# Altium PCB PCB.PcbDoc
Units mil, origin at the board's own origin, x right, y up, seen from the top; angles counter-clockwise.
Board outline 1968.5 x 1968.5 mil, 2 copper layers (Top Layer, Bottom Layer); 59 components, 71 nets, 276 pads, 81 vias.
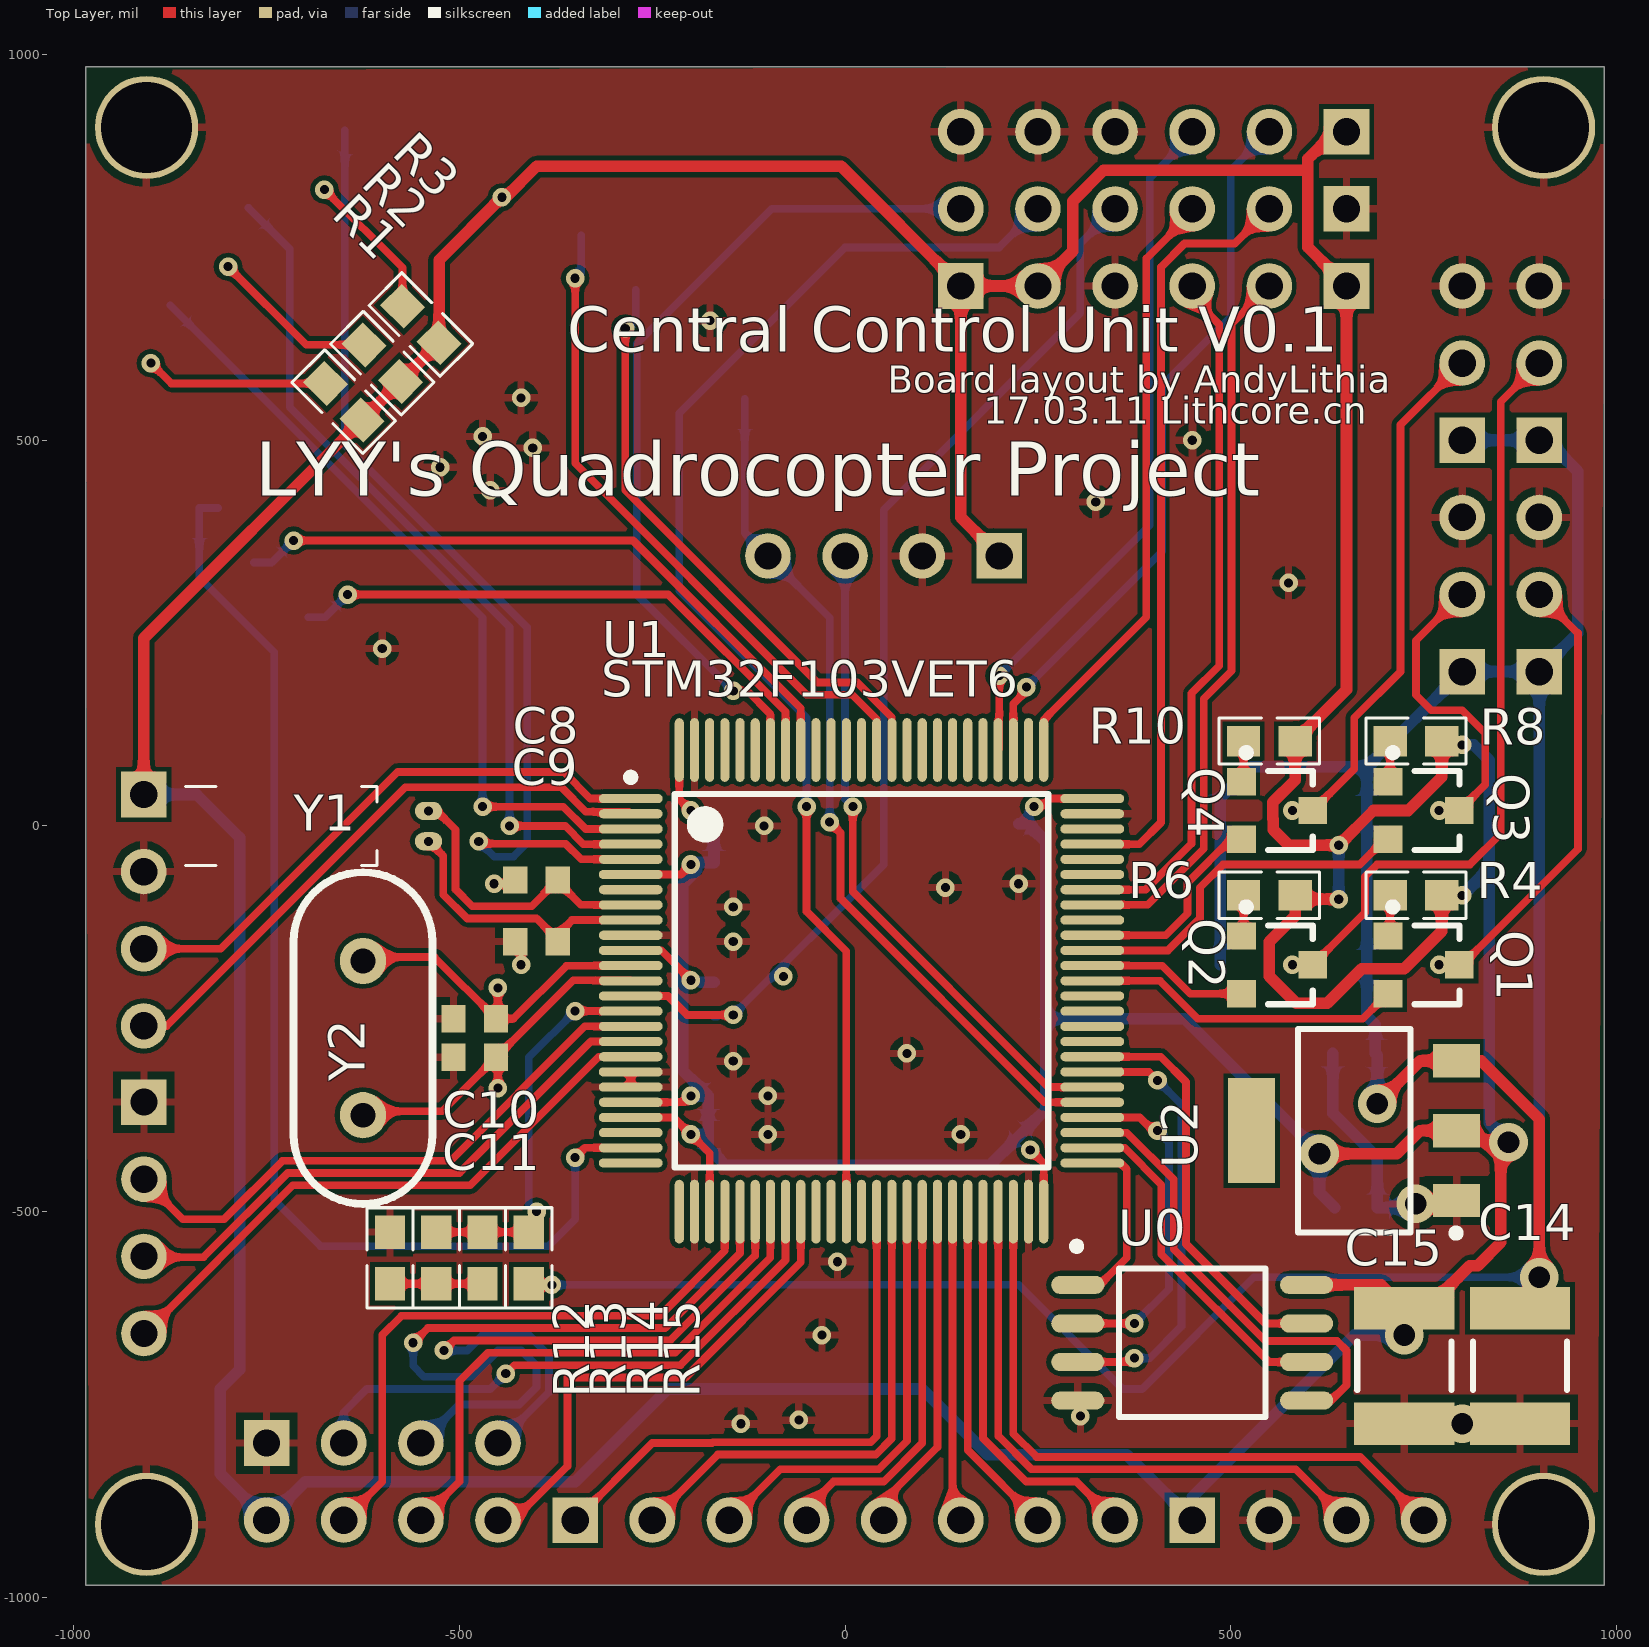
[diagram p0: Top Layer view]
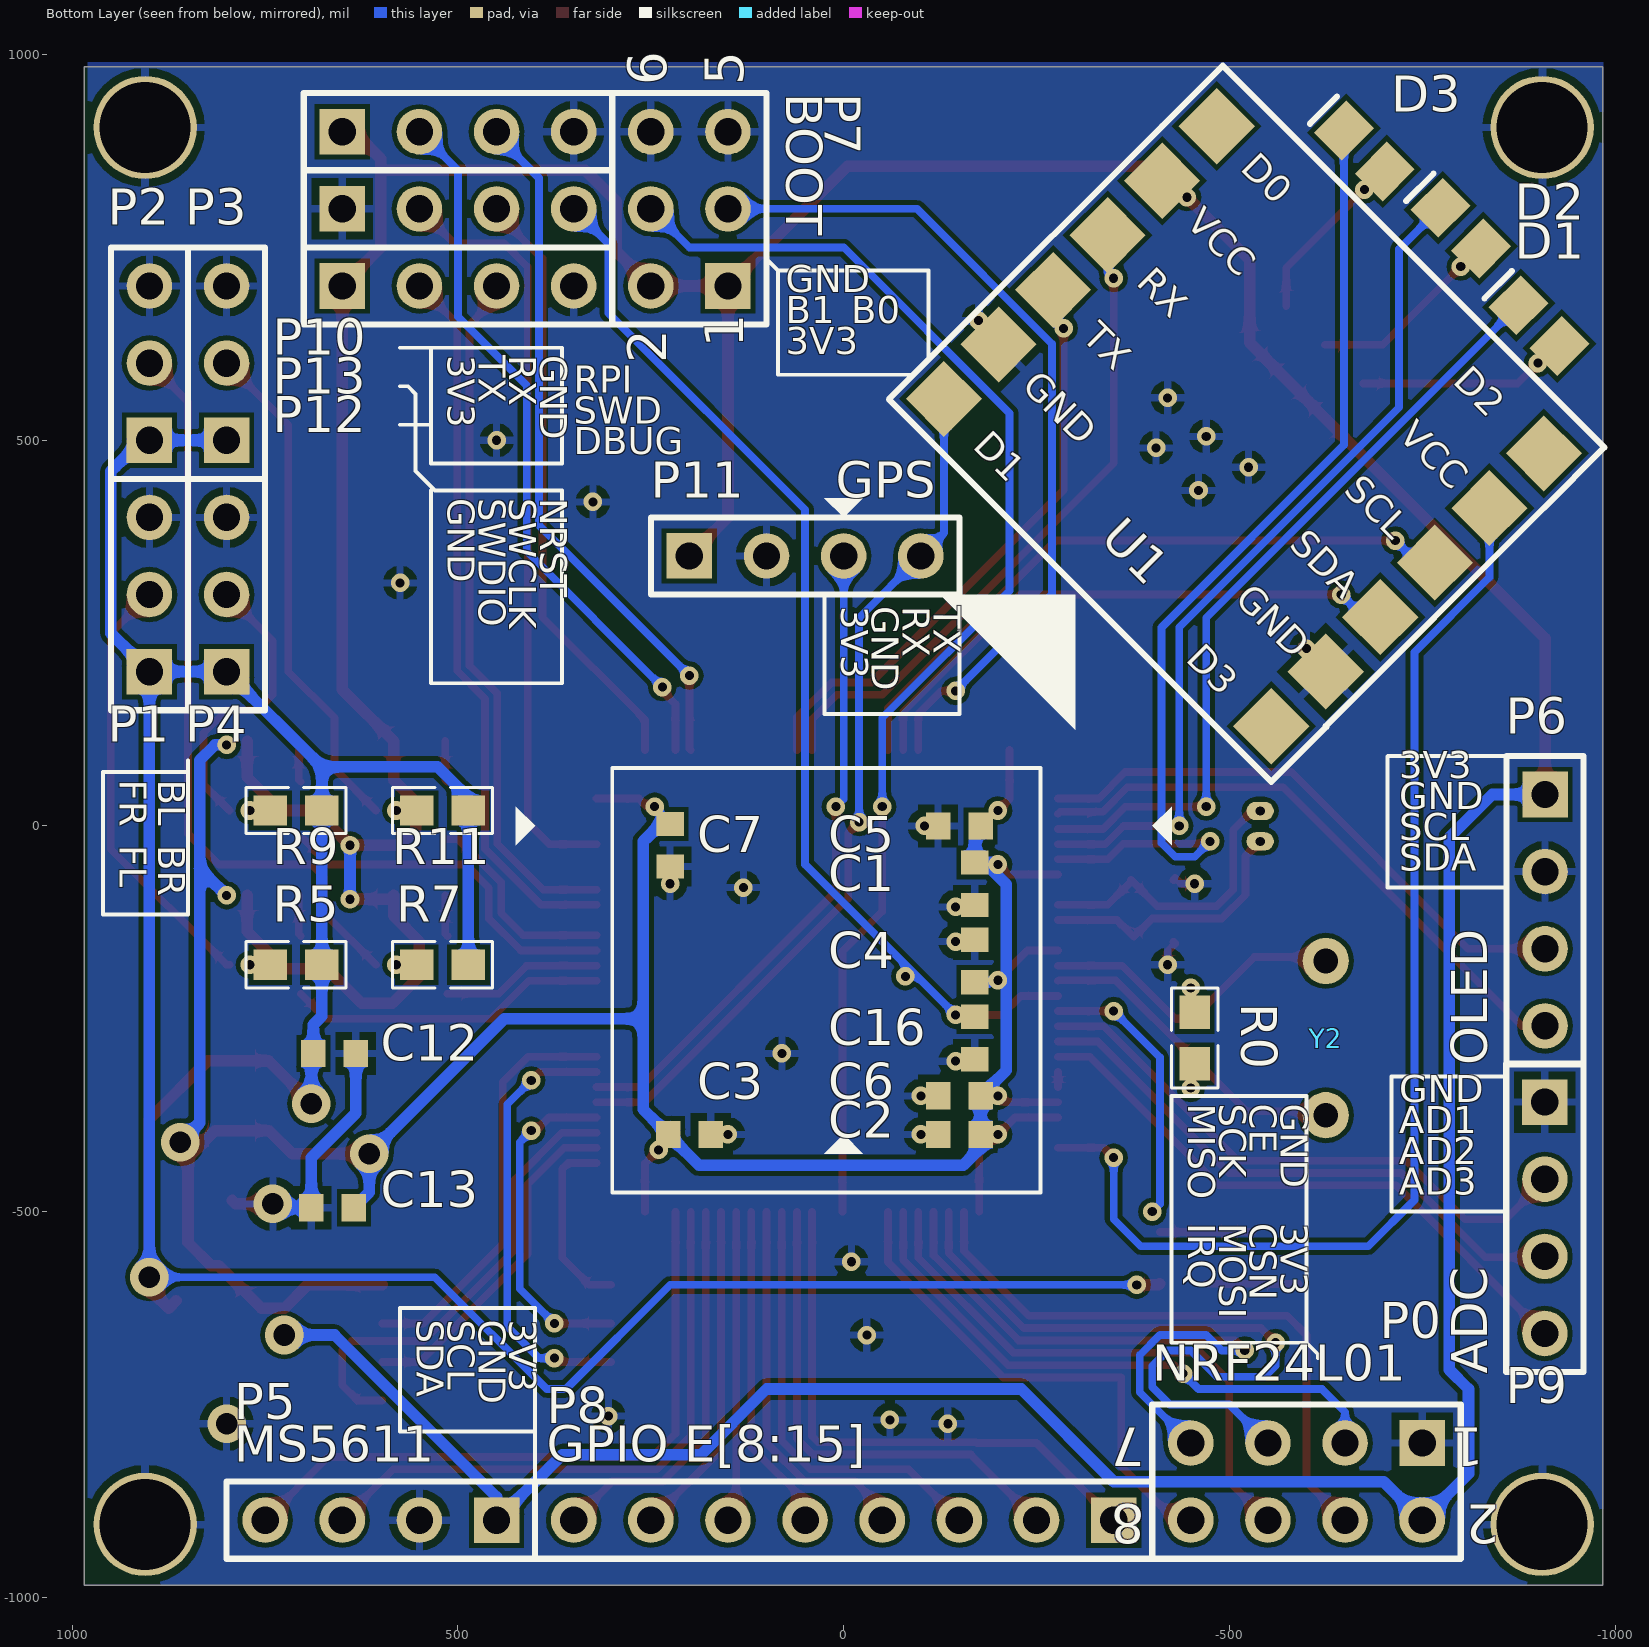
[diagram p1: Bottom Layer view, seen from below]

## Layer stack, top to bottom
Top Solder: solder mask 0.4, Solder Resist, Dk 3.5
Top Layer: signal copper 1.4
Dielectric 1: dielectric 12.6, FR-4, Dk 4.8
Bottom Layer: signal copper 1.4
Bottom Solder: solder mask 0.4, Solder Resist, Dk 3.5

## Board outline
-984.25,-984.25 -984.25,984.25 984.25,984.25 984.25,-984.25

## Design rules (kind name [scope] priority, off if disabled: settings)
Clearance [All] p1: gap=6 ignorepadtopadclearanceinfootprint=FALSE except(0: Arc-Hole Track-Hole SMDPad-Hole THPad-Hole Via-Hole Fill-Hole Poly-Hole Region-Hole Text-Hole)
ComponentClearance [All] p1 off: gap=10 collisioncheckmode=3 verticalgap=10 showdistances=FALSE
PolygonConnect [All] p1: connectstyle=Relief reliefconductorwidth=10 reliefentries=4 polygonreliefangle="90 Angle" airgapwidth=10
RoutingVias [All] p1: holewidth=28 width=50 viastyle="Through Hole" minholewidth=28 minwidth=50 maxholewidth=28 maxwidth=50
SolderMaskExpansion [All] p1: expansion=4
Width [All] p1: maxlimit=20 minlimit=6 preferedwidth=10
29 further rules are at their usual default settings.

## Components (designator, comment, footprint, x,y, rotation, side; value= is the part's Value field where it differs from the comment)
C1 "Cap Semi" 1608[0603] -170,-75 r90 bottom
C2 "Cap Semi" 1608[0603] -150,-400 r180 bottom
C3 "Cap Semi" 1608[0603] 200,-400 r0 bottom
C4 "Cap Semi" 1608[0603] -170,-175 r270 bottom
C5 "Cap Semi" 1608[0603] -150,0 r180 bottom
C6 "Cap Semi" 1608[0603] -150,-350 r0 bottom
C7 "Cap Semi" 1608[0603] 225,-25 r270 bottom
C8 "Cap Semi" 1608[0603] -400,-70 r0 top
C9 "Cap Semi" 1608[0603] -400,-150 r0 top
C10 "Cap Semi" 1608[0603] -480,-250 r0 top
C11 "Cap Semi" 1608[0603] -480,-300 r0 top
C12 "Cap Semi" 1608[0603] 660,-295 r0 bottom
C13 "Cap Semi" 1608[0603] 662.56,-495 r180 bottom
C14 "Cap Pol3" 1812 875,-700 r270 top
C15 "Cap Pol3" 1812 725,-700 r270 top
C16 "Cap Semi" 1608[0603] -170,-275 r270 bottom
D1 "LED0" LED_0805 -901.45,648.55 r45 bottom
D2 "LED0" LED_0805 -800,775 r45 bottom
D3 "LED0" LED_0805 -675,875 r45 bottom
P0 "NRF24L01" HDR2X4 -750,-800 r0 bottom
P1 "PWM" HDR1X3 900,200 r90 bottom
P2 "PWM" HDR1X3 900,500 r90 bottom
P3 "PWM" HDR1X3 800,500 r90 bottom
P4 "PWM" HDR1X3 800,200 r90 bottom
P5 "MS5611" HDR1X4 450,-900 r0 bottom
P6 "OLED" HDR1X4 -909.25,40.75 r270 bottom
P7 "BOOT" HDR2X3 150,700 r90 bottom
P8 "GPIO E[8:15]" HDR1X8 -350,-900 r0 bottom
P9 "ADC" HDR1X4 -909,-358 r270 bottom
P10 "RPI" HDR1X4 650,900 r180 bottom
P11 "GPS" HDR1X4 200,350 r180 bottom
P12 "DBUG" HDR1X4 650,700 r180 bottom
P13 "SWD" HDR1X4 650,800 r180 bottom
Q1 "BCP68" SOT-23 750,-180 r270 top
Q2 "BCP68" SOT-23 560,-180 r270 top
Q3 "BCP68" SOT-23 750,20 r270 top
Q4 "BCP68" SOT-23 560,20 r270 top
R0 "Res3" 0603-1 -455,-275 r90 bottom
R1 "Res1" 0603-1 -650,550 r135 top
R2 "Res1" 0603-1 -600,600 r135 top
R3 "Res1" 0603-1 -550,650 r135 top
R4 "Res1" 0603-1 740,-90 r0 top
R5 "Res1" 0603-1 710,-180 r180 bottom
R6 "Res1" 0603-1 550,-90 r0 top
R7 "Res1" 0603-1 520,-180 r180 bottom
R8 "Res1" 0603-1 740,110 r0 top
R9 "Res1" 0603-1 710,20 r180 bottom
R10 "Res1" 0603-1 550,110 r0 top
R11 "Res1" 0603-1 520,20 r180 bottom
R12 "Res1" 0603-1 -590,-560 r270 top
R13 "Res1" 0603-1 -530,-560 r90 top
R14 "Res1" 0603-1 -470,-560 r90 top
R15 "Res1" 0603-1 -410,-560 r270 top
U0 "W25QXX" SOIC8_W 450,-670 r0 top
U1 "IMU-JY901" "JY-901 - rr" -129.84,554.26 r225 bottom
U1 "STM32F103VET6" LQFP-100_M 21.26,-200.79 r0 top (schematic designator "AutoPilot V1.0")
U2 "ASM1117" SOT-223 660,-395 r90 top
Y1 "XTAL_SM" "X-2X6C - duplicate" -540,-0.32 r270 top
Y2 "XTAL" X-HC49U-nf -625,-275 r90 bottom

## Footprints (in the part's own frame and the unit in brackets; to place one, negate y for a bottom-side part, rotate by r counter-clockwise, add the part's x,y. Pads: shape width x height; smd on the part's side, far side on the other; paste and mask are expansions set on the pad)
0603-1 [mm] "贴片带丝印"
  rect 1.1x1 smd: 1(-0.85,0) 2(0.85,0)
  silkscreen extent -1.65,-0.76 1.65,0.76, body extent -1.14,-0.38 1.14,0.38, height 1
1608[0603] [mm] "Chip Capacitor, Body 1.6x0.8mm, IPC High Density"
  rect 0.8x0.9 smd: 1(-0.7,0) 2(0.7,0)
  body extent -0.87,-0.48 0.87,0.48, height 1.3
1812 [mm] "Chip Capacitor, Body 4.5x3.2mm, IPC High Density"
  rect 1.4x3.3 smd: 1(-1.9,0) 2(1.9,0)
  silkscreen extent -0.8,-1.55 0.8,1.55, body extent -2.4,-1.7 2.4,1.7, height 1.4
HDR1X3 [mm] "Connector; Header; 3 Position"
  rect 1.5x1.5 hole 0.9: 1(0,0)
  round 1.5 hole 0.9: 2(2.54,0) 3(5.08,0)
  silkscreen extent -1.27,-1.27 6.35,1.27
HDR1X4 [mm] "Connector; Header; 4 Position"
  rect 1.5x1.5 hole 0.9: 1(0,0)
  round 1.5 hole 0.9: 2(2.54,0) 3(5.08,0) 4(7.62,0)
  silkscreen extent -1.27,-1.27 8.89,1.27
HDR1X8 [mm] "Connector; Header; 8 Position"
  rect 1.5x1.5 hole 0.9: 1(0,0)
  round 1.5 hole 0.9: 2(2.54,0) 3(5.08,0) 4(7.62,0) 5(10.16,0) 6(12.7,0) 7(15.24,0) 8(17.78,0)
  silkscreen extent -1.27,-1.27 19.05,1.27
HDR2X3 [mm] "Connector; Header; 3x2 Position"
  rect 1.5x1.5 hole 0.9: 1(0,0)
  round 1.5 hole 0.9: 2(0,2.54) 3(2.54,0) 4(2.54,2.54) 5(5.08,0) 6(5.08,2.54)
  silkscreen extent -1.27,-1.27 6.35,3.81
HDR2X4 [mm] "Connector; Header; 4x2 Position"
  rect 1.5x1.5 hole 0.9: 1(0,0)
  round 1.5 hole 0.9: 2(0,2.54) 3(2.54,0) 4(2.54,2.54) 5(5.08,0) 6(5.08,2.54) 7(7.62,0) 8(7.62,2.54)
  silkscreen extent -1.27,-1.27 8.89,3.81
"JY-901 - rr" [mil]
  rect 70x70 smd: 1(0.63,499.63) 2(0.63,399.63) 3(0.63,299.63) 4(0.63,199.63) 5(0.63,99.63) 6(0.63,-0.37) 7(600.63,499.63) 8(600.63,399.63) 9(600.63,299.63) 10(600.63,199.63) 11(600.63,99.63) 12(600.63,-0.37)
  silkscreen extent -49,-51 652,561
LED_0805 [mm] "贴片二极管"
  rect 1.3x1.5 smd: 1(-0.95,0) 2(0.95,0)
  silkscreen extent 1.9,-0.64 1.9,0.64
LQFP-100_M [mm] "Thin QFP, 100"
  oval 2.1x0.3 smd: 1(-7.6,6) 2(-7.6,5.5) 3(-7.6,5) 4(-7.6,4.5) 5(-7.6,4) 6(-7.6,3.5) 7(-7.6,3) 8(-7.6,2.5) 9(-7.6,2) 10(-7.6,1.5) 11(-7.6,1) 12(-7.6,0.5) 13(-7.6,0) 14(-7.6,-0.5) 15(-7.6,-1) 16(-7.6,-1.5) 17(-7.6,-2) 18(-7.6,-2.5) 19(-7.6,-3) 20(-7.6,-3.5) 21(-7.6,-4) 22(-7.6,-4.5) 23(-7.6,-5) 24(-7.6,-5.5) 25(-7.6,-6) 51(7.6,-6) 52(7.6,-5.5) 53(7.6,-5) 54(7.6,-4.5) 55(7.6,-4) 56(7.6,-3.5) 57(7.6,-3) 58(7.6,-2.5) 59(7.6,-2) 60(7.6,-1.5) 61(7.6,-1) 62(7.6,-0.5) 63(7.6,0) 64(7.6,0.5) 65(7.6,1) 66(7.6,1.5) 67(7.6,2) 68(7.6,2.5) 69(7.6,3) 70(7.6,3.5) 71(7.6,4) 72(7.6,4.5) 73(7.6,5) 74(7.6,5.5) 75(7.6,6)
  oval 0.3x2.1 smd: 26(-6,-7.6) 27(-5.5,-7.6) 28(-5,-7.6) 29(-4.5,-7.6) 30(-4,-7.6) 31(-3.5,-7.6) 32(-3,-7.6) 33(-2.5,-7.6) 34(-2,-7.6) 35(-1.5,-7.6) 36(-1,-7.6) 37(-0.5,-7.6) 38(0,-7.6) 39(0.5,-7.6) 40(1,-7.6) 41(1.5,-7.6) 42(2,-7.6) 43(2.5,-7.6) 44(3,-7.6) 45(3.5,-7.6) 46(4,-7.6) 47(4.5,-7.6) 48(5,-7.6) 49(5.5,-7.6) 50(6,-7.6) 76(6,7.6) 77(5.5,7.6) 78(5,7.6) 79(4.5,7.6) 80(4,7.6) 81(3.5,7.6) 82(3,7.6) 83(2.5,7.6) 84(2,7.6) 85(1.5,7.6) 86(1,7.6) 87(0.5,7.6) 88(0,7.6) 89(-0.5,7.6) 90(-1,7.6) 91(-1.5,7.6) 92(-2,7.6) 93(-2.5,7.6) 94(-3,7.6) 95(-3.5,7.6) 96(-4,7.6) 97(-4.5,7.6) 98(-5,7.6) 99(-5.5,7.6) 100(-6,7.6)
  silkscreen extent -7.72,-6.15 6.15,6.82, body extent -7,-7 7,7, height 0.8
SOIC8_W [mm] "SPI_FLASH"
  oval 1.75x0.6 smd: 1(-3.768,1.905) 2(-3.768,0.635) 3(-3.768,-0.635) 4(-3.768,-1.905) 5(3.768,-1.905) 6(3.768,-0.635) 7(3.768,0.635) 8(3.768,1.905)
  silkscreen extent -3.93,-2.45 2.41,3.3
SOT-23 [mm]
  rect 0.9x0.95 smd: 1(-0.95,-1.175) 2(0.95,-1.175) 3(0,1.175)
  silkscreen extent -2.03,-1.14 1.3,1.18
SOT-223 [mm]
  rect 1.1x1.55 smd: 1(-2.3,-3.375) 2(0,-3.375) 3(2.3,-3.375)
  rect 3.45x1.55 smd: 4(0,3.375)
  silkscreen extent -3.5,-3.48 3.35,1.85, body extent -3.3,-3.94 3.3,3.43, height 0.8
"X-2X6C - duplicate" [mm] "Cylinder Xtal"
  oval 0.6x0.9 hole 0.3: 1(-0.5,0) 2(0.5,0)
  silkscreen extent -1.3,-8 1.3,-1.7, body extent -0.99,-8 1,-2, height 2
X-HC49U-nf [mil] "插件晶振"
  round 60 hole 32: 1(-100,0) 2(100,0)

## Part data
C1 C2 C3 C4 C5 C6 C7 C8 C9 C10 C11 C12 C13 C16: "Capacitor (Semiconductor SIM Model)"
C14 C15: "Polarized Capacitor (Surface Mount)"
D1 D2 D3: "发光二极管"
P0: library part "Header 4X2", "Header, 4-Pin, Dual row"
P1 P2 P3 P4: library part "Header 3", "Header, 3-Pin"
P5 P6 P9 P10 P11 P12 P13: library part "Header 4", "Header, 4-Pin"
P7: library part "Header 3X2", "Header, 3-Pin, Dual row"
P8: library part "Header 8", "Header, 8-Pin"
Q1 Q2 Q3 Q4: "NPN三极管"
R0: "Resistor"
R1 R2 R3 R4 R5 R6 R7 R8 R9 R10 R11 R12 R13 R14 R15: "贴片电阻"
U0: "SPI FLASH"
U1: library part JY901
U1: library part STM32F103V, "STM32单片机100引脚"
U2: "3.3V稳压芯片"
Y1: "圆柱晶振"
Y2: "晶振"

## Free pads (board coordinates)
  round 133.86 hole 118.11: 1(-905.51,-905.51) 1(-905.51,905.51) 1(905.51,-905.51) 1(905.51,905.51)

## Via types
v1: diameter 24, hole 11.81, Top Layer to Bottom Layer, 74 vias
v2: diameter 50, hole 28, Top Layer to Bottom Layer, 7 vias

## Nets (pads, with @x,y where several pads share a name; then routed paths per layer and width w, separated by ;. In a path a pad name is that pad's centre, name@x,y a point inside that pad or via, vN(x,y) a via of type N, cw(c..) or ccw(c..) an arc to the next point about the centre after c; other vN are vias at no path point)
ADC_0: R13.2 R14.2 R15.1 U1.15 | length 481.1
  Top Layer w10: R13.2 R15.1 ; v1(-350,-240) -278.11,-240 U1.15
  Bottom Layer w10: v1(-400,-500) -410,-490 -410,-300 v1(-350,-240)
ADC_1: P9.2 U1.16 | length 755.9
  Top Layer w10: P9.2@-909.25,-459.25 -858.5,-510 -805.25,-510 -729.25,-434 -511.47,-434 -337.32,-259.84 U1.16
ADC_2: P9.3 U1.17 | length 747.2
  Top Layer w10: P9.3@-909.25,-559.25 -831.88,-559.25 -722.63,-450 -500,-450 -329.53,-279.53 U1.17
ADC_3: P9.4 U1.18 | length 780.4
  Top Layer w10: P9.4@-909.25,-659.25 -716,-466 -486,-466 -319.21,-299.21 U1.18
BOOT0: P7.3 U1.94 | length 1101.4
  Top Layer w10: v1(-145,175) -126.81,175 -96.85,145.04 U1.94
  Bottom Layer w10: v1(-145,175) -270,300 -270,625 -95,800 P7.3
BOOT1: P7.4 U1.37 | length 1699.5
  Top Layer w10: v1(-50,25) -50,-110.86 1.57,-162.44 U1.37
  Bottom Layer w10: v1(-50,25) -50,140 -215,305 -215,535 0,750 200,750 P7.4
DEBUG_RX: P12.3 U1.69 | length 905.7
  Top Layer w10: U1.69 389.44,-82.68 449,-23.12 449,171.63 485,207.63 485,650 450,685 P12.3
DEBUG_TX: P12.2 U1.68 | length 939.6
  Top Layer w10: U1.68 392.38,-102.36 465,-29.75 465,165 501,201 501,651 P12.2
FLASH_CSN: U0.1 U1.51 | length 240.7
  Top Layer w10: U0.1 330,-595 365,-560 365,-445 357.01,-437.01 U1.51
FLASH_HOLD: U0.7 U1.58 | length 544.1
  Top Layer w10: U1.58 409.21,-299.21 442,-332 442,-542 545,-645 U0.7
FLASH_MISO: U0.5 U1.53 | length 604.3
  Top Layer w10: U1.53 365.27,-397.64 426,-458.37 426,-548.63 545.18,-667.81 637.81,-667.81 650,-680 650,-725 630,-745 U0.5
FLASH_MOSI: U0.2 U1.54 | length 439.8
  Top Layer w10: U0.2 v1(375,-645) ; U1.54 382.05,-377.95 399.09,-395 v1(405,-395)
  Bottom Layer w10: v1(375,-645) 420,-600 420,-410 v1(405,-395)
FLASH_SCK: U0.6 U1.52 | length 445.8
  Top Layer w10: U1.52 362.32,-417.32 410,-465 410,-555.25 549.75,-695 U0.6
FLASH_WP: U0.3 U1.57 | length 574.4
  Top Layer w10: U0.3 370,-695 v1(375,-690) ; U1.57 393.9,-318.9 v1(405,-330)
  Bottom Layer w10: v1(375,-690) 395,-690 436,-649 436,-361 v1(405,-330)
GND: C1.1 C2.1 C3.1 C4.1 C5.1 C6.2 C7.2 C8.1 C9.1 C10.1 C11.1 C12.1 C13.1 C14.2 C15.2 C16.2 P0.1 P1.3 P2.3 P3.3 P4.3 P5.2 P6.2 P7.5 P7.6 P9.1 P10.4 P11.2 P12.4 P13.1 pad.1 R12.1 U0.4 U1.5@-200.74,624.26 U1.10@-277.95,-141.73 U1.11@-625,200 U1.19 U1.20 U1.27 U1.49 U1.74 U1.99 U2.1 | length 416.9
  Top Layer w10: v1(-455,-75) -437.44,-75 -430,-67.56 C8.1 ; C9.1 -430,-152.44 -420,-162.44 v1(-420,-180) ; U1.20 U1.19
  Top Layer w15: v2(740,-490) 788.43,-490 U2.1
  Bottom Layer w15: C12.1 632.44,-372.44 690.12,-430.12 C13.1 735,-495 v2(740,-490)
  other v1: -135,-775 -60,-770 305,-765 -30,-660 -10,-565 -100,-400 150,-400 -100,-350 -145,-305 80,-295 -145,-150 -145,-105 130,-80 225,-75 -105,0 -600,230 575,315 325,420 -460,435 -525,465 -405,490 450,500 -470,505 -420,555 -175,655
  other v2: 800,-775
GPS_RX: P11.3 U1.56 | length 854.7
  Top Layer w10: v1(10,25) 10,-85 263.58,-338.58 U1.56
  Bottom Layer w10: P11.3 0,35 v1(10,25)
GPS_TX: P11.4 U1.6@-130.03,553.55 U1.55 | length 1134.9
  Top Layer w10: v1(-20,5) -6,-9 -6,-94 258.27,-358.27 U1.55
  Bottom Layer w10: U1.6@-130.03,553.55 -130.03,380.03 P11.4 -20,270 v1(-20,5)
IIC_SOFT_SCL: P6.3 U1.1@-277.95,35.43 | length 740.6
  Top Layer w10: P6.3 -809.25,-159.25 -580,70 -365,70 -330.43,35.43 U1.1@-277.95,35.43
IIC_SOFT_SDA: P6.4 U1.2@-277.95,15.75 | length 773.6
  Top Layer w10: P6.4 -879.25,-259.25 -570,50 -367.63,50 -336.15,18.53 -280.73,18.53 U1.2@-277.95,15.75
IMU_MS: U1.8@-837.13,412.13 U1.24 | length 1548.3
  Top Layer w10: v1(-350,-430) -337.32,-417.32 U1.24
  Bottom Layer w10: U1.8@-812.87,412.13 -837.13,412.13 -837.13,322.13 -740,225 -740,-485 -680,-545 -385,-545 -350,-510 v1(-350,-430)
IMU_RX: U1.3@-342.16,765.69 U1.87 | length 867
  Top Layer w10: v1(-350,710) -350,470 -50,170 9.03,170 40.94,138.08 U1.87
  Bottom Layer w10: v1(-350,710) -342.16,717.84 U1.3@-342.16,765.69
IMU_SCL: U1.9@-766.42,341.42 U1.92 | length 864.9
  Top Layer w10: v1(-715,370) -275,370 -57.48,152.48 U1.92
  Bottom Layer w10: U1.9@-766.42,341.42 -743.58,341.42 v1(-715,370)
IMU_SDA: U1.10@-695.71,270.71 U1.93 | length 743.2
  Top Layer w10: v1(-645,300) -229.18,300 -77.17,147.98 U1.93
  Bottom Layer w10: U1.10@-695.71,270.71 -674.29,270.71 v1(-645,300)
IMU_TX: U1.4@-271.45,694.97 U1.86 | length 775.6
  Top Layer w10: v1(-285,645) -285,435 -36,186 15.65,186 60.63,141.02 U1.86
  Bottom Layer w10: v1(-285,645) -271.45,658.55 U1.4@-271.45,694.97
LED0: D1.2 U1.3@-277.95,-3.94 | length 1021.8
  Top Layer w10: v1(-470,25) -365.25,25 -336.32,-3.94 U1.3@-277.95,-3.94
  Bottom Layer w10: D1.2 -470,270 v1(-470,25)
LED1: D2.2 U1.4@-277.95,-23.62 | length 1108.5
  Top Layer w10: v1(-435,0) -362.88,0 -339.26,-23.62 U1.4@-277.95,-23.62
  Bottom Layer w10: D2.2 -720,747.89 -720,542.63 -435,257.63 v1(-435,0)
LED2: D3.2 U1.5@-277.95,-43.31 | length 1306.9
  Top Layer w10: v1(-475,-20) -472,-23 -362.51,-23 -342.2,-43.31 U1.5@-277.95,-43.31
  Bottom Layer w10: D3.2 -648.55,493.81 -412,257.25 -412,-22 -430,-40 -455,-40 v1(-475,-20)
MS5611_SCL: P5.3 U1.47 | length 787.6
  Top Layer w10: U1.47 198.43,-790.8 241.63,-834 584,-834 P5.3
MS5611_SDA: P5.4 U1.48 | length 866.2
  Top Layer w10: U1.48 218.11,-787.86 248.25,-818 668,-818 P5.4
NetD1_1: D1.1 R1.2 | length 237.2
  Top Layer w10: v1(-900,600) -873.66,573.66 R1.2
NetD2_1: D2.1 R2.2 | length 218.3
  Top Layer w10: v1(-800,725) -698.66,623.66 R2.2
NetD3_1: D3.1 R3.2 | length 193.3
  Top Layer w10: v1(-675,825) -573.66,723.66 R3.2
NetQ1_1: Q1.1 R4.1 | length 53.8
  Top Layer w10: Q1.1 706.54,-139.8 R4.1
NetQ2_1: Q2.1 R6.1 | length 53.8
  Top Layer w10: Q2.1 516.54,-139.8 R6.1
NetQ3_1: Q3.1 R8.1 | length 53.8
  Top Layer w10: Q3.1 706.54,60.2 R8.1
NetQ4_1: Q4.1 R10.1 | length 53.8
  Top Layer w10: Q4.1 516.54,60.2 R10.1
NetR12_2: R12.2 R13.1 R14.1 | length 120
  Top Layer w10: R12.2 R13.1 R14.1
NRF_CE: P0.3 U1.33 | length 757.2
  Top Layer w10: v1(-440,-710) -429,-699 -213.49,-699 -77.17,-562.67 U1.33
  Bottom Layer w10: P0.3 -650,-760 -620,-730 -460,-730 v1(-440,-710)
NRF_CSN: P0.4 U1.29 | length 800.9
  Top Layer w10: P0.4 -600,-850 -600,-660 -575,-635 -240,-635 -155.91,-550.91 U1.29
NRF_IRQ: P0.8 U1.34 | length 664
  Top Layer w10: P0.8 -430,-900 -360,-830 -360,-715 -206.86,-715 -57.48,-565.62 U1.34
NRF_MISO: P0.7 U1.31 | length 807.7
  Top Layer w10: v1(-520,-680) -507,-667 -226.75,-667 -116.54,-556.79 U1.31
  Bottom Layer w10: v1(-520,-680) -490,-680 -470,-660 -410,-660 -384,-686 -384,-734 P0.7
NRF_MOSI: P0.6 U1.32 | length 730
  Top Layer w10: P0.6 -500,-850 -500,-720 -463,-683 -220.12,-683 -96.85,-559.73 U1.32
NRF_SCK: P0.5 U1.30 | length 951.4
  Top Layer w10: v1(-560,-670) -541,-651 -233.37,-651 -136.22,-553.85 U1.30
  Bottom Layer w10: v1(-560,-670) -560,-700 -546,-714 -484,-714 -450,-680 -420,-680 -400,-700 -400,-727.37 -422.63,-750 -500,-750 P0.5
OSC32_IN: C8.2 U1.8@-277.95,-102.36 Y1.1 | length 381.5
  Top Layer w10: Y1.1@-540,19.68 -529.68,19.68 -505,-5 -505,-82.37 -483.37,-104 -406.44,-104 C8.2 ; C8.2@-369.88,-75 -342.52,-102.36 U1.8@-277.95,-102.36
OSC32_OUT: C9.2 U1.9@-277.95,-122.05 Y1.2 | length 351.6
  Top Layer w10: Y1.2 -521,-39 -521,-89 -490,-120 -400,-120 -376.22,-143.78 -354.49,-122.05 U1.9@-277.95,-122.05
OSC_IN: C10.2 R0.2 U1.12@-277.95,-181.1 Y2.2 | length 454.7
  Top Layer w10: Y2.2@-630,-170 -532.44,-170 C10.2 ; v1(-450,-210) -450,-247.56 C10.2 ; U1.12@-277.95,-181.1 -361.1,-181.1 -430,-250 C10.2
OSC_OUT: C11.2 R0.1 U1.13 Y2.1 | length 463.8
  Top Layer w10: Y2.1@-630,-370 -522.44,-370 C11.2 ; v1(-450,-340) -450,-302.44 C11.2 ; U1.13 -278.74,-200 -352.44,-200 C11.2
PE8: P8.1 U1.39 | length 727.2
  Top Layer w10: P8.1 -250,-800 -172.63,-800 -171.63,-799 33.12,-799 40.94,-791.17 U1.39
PE9: P8.2 U1.40 | length 648.6
  Top Layer w10: P8.2 -165,-815 39.75,-815 60.63,-794.12 U1.40
PE10: P8.3 U1.41 | length 570
  Top Layer w10: P8.3 -84,-834 43.37,-834 80.31,-797.06 U1.41
PE11: P8.4 U1.42 | length 500.2
  Top Layer w10: P8.4 -50,-885 -15,-850 50,-850 100,-800 U1.42
PE12: P8.5 U1.43 | length 428.9
  Top Layer w10: P8.5 50,-875 119.68,-805.32 U1.43
PE13: P8.6 U1.44 | length 425.7
  Top Layer w10: U1.44 139.37,-910.63 P8.6
PE14: P8.7 U1.45 | length 437.7
  Top Layer w10: U1.45 159.06,-809.06 P8.7
PE15: P8.8 U1.46 | length 509
  Top Layer w10: U1.46 178.74,-793.74 235,-850 300,-850 P8.8
PWM_BL: Q4.2 U1.66 | length 268.2
  Top Layer w10: U1.66 415.64,-141.73 444,-113.37 444,-73.37 499.97,-17.4 Q4.2
PWM_BL_F: P3.2 Q4.3 R11.1 | length 660.2
  Top Layer w10: Q4.3 660,73.74 660,140 720,200 720,520 P3.2
  other v1: 580,20
PWM_BR: Q3.2 U1.65 | length 466.4
  Top Layer w10: U1.65 418.58,-161.42 460,-120 460,-80 490,-50 667.01,-50 699.61,-17.4 Q3.2
PWM_BR_F: P4.2 Q3.3 R9.1 | length 379.5
  Top Layer w10: Q3.3 830,53.74 830,120 800,150 760,150 740,170 740,240 P4.2
  other v1: 770,20
PWM_FL: Q1.2 U1.63 | length 417.2
  Top Layer w10: U1.63 408.16,-200.79 457.37,-250 671.14,-250 Q1.2
PWM_FL_F: P1.2 Q1.3 R5.1 | length 566.6
  Top Layer w10: Q1.3 800,-180 950,-30 950,250 P1.2
  other v1: 770,-180
PWM_FR: Q2.2 U1.64 | length 208.3
  Top Layer w10: U1.64 411.1,-181.1 447.4,-217.4 Q2.2
PWM_FR_F: P2.2 Q2.3 R7.1 | length 972.2
  Top Layer w10: Q2.3 673.88,-112.38 673.88,-65.76 689.64,-50 810,-50 850,-10 850,550 P2.2
  other v1: 580,-180
RAS_RX: P10.3 U1.79 | length 905.8
  Top Layer w10: U1.79 200,100 v1(200,195)
  Bottom Layer w10: v1(200,195) 395,390 395,840 450,895 P10.3
RAS_TX: P10.2 U1.78 | length 939
  Top Layer w10: U1.78 218.11,158.11 235,175 v1(235,180)
  Bottom Layer w10: v1(235,180) 411,356 411,571 500,660 500,850 P10.2
RST: C16.1 P13.4 U1.14 | length 1400.7
  Top Layer w10: U1.14 -229.53,-220.47 -205,-245 v1(-145,-245)
  Bottom Layer w10: C16.1 -165.86,-247.44 C16.1@-163.42,-245 ; v1(-145,-245) 50,-50 50,410 305,665 305,755 P13.4
  other v1: -80,-195
RTC: U1.7@-277.95,-82.68
SWCLK: P13.3 U1.76 | length 781.3
  Top Layer w10: U1.76 257.48,137.48 390.53,270.53 390.53,735.53 450,795 P13.3
SWDIO: P13.2 U1.72 | length 992.4
  Top Layer w10: U1.72 381.38,-23.62 409.47,4.47 409.47,724.47 440,755 505,755 P13.2
VCC: C12.2 C14.1 P1.1 P2.1 P3.1 P4.1 R5.2 R7.2 R9.2 R11.2 R15.2 U2.3 | length 4326.9
  Top Layer w15: R15.2 -408.46,-595 v1(-380,-595) ; v2(690,-360) 745.55,-304.45 U2.3 824.45,-304.45 900,-380 v2(900,-585) 900,-600.2 C14.1 C14.1@865.55,-615.75
  Bottom Layer w10: v1(-380,-595) 225,-595 360,-730 385,-730 530,-585 v2(900,-585)
  Bottom Layer w15: R7.2 R11.2 486.54,36.54 526.54,76.54 676.54,76.54 ; v2(690,-360) 690,-297.44 C12.2 687.56,-257.56 676.54,-246.54 R5.2 R9.2 676.54,76.54 ; P3.1 P2.1 910,500 950,460 950,250 P1.1 ; v2@900,-580 P1.1 ; 676.54,76.54 P4.1 P1.1
VCC3.3: C1.2 C2.2 C3.2 C4.2 C5.2 C6.1 C7.1 C13.2 C15.1 P0.2 P5.1 P6.1 P7.1 P7.2 P10.1 P11.1 P12.1 R1.1 R2.1 R3.1 R4.2 R6.2 R8.2 R10.2 U0.8 U1.2@-412.87,836.4 U1.6@-277.95,-62.99 U1.11@-277.95,-161.42 U1.21 U1.22 U1.28 U1.50 U1.75 U1.100 U2.2 | length 11160.9
  Top Layer w10: U1.22 -222.05,-377.95 v1(-200,-400) -175.59,-424.41 U1.28 ; U1.21 -208.27,-358.27 v1(-200,-350) ; U1.11@-277.95,-161.42 -238.3,-161.42 -200,-199.71 v1(-200,-200) ; U1.6@-277.95,-62.99 -212.99,-62.99 v1(-200,-50) ; U1.100 -214.96,34.96 v1(-200,20) ; v1(240,-420) 257.48,-437.48 U1.50 ; v1(245,25) 255,25 265.43,35.43 U1.75
  Top Layer w15: P6.1 -909.25,243.42 R1.1 R2.1 R3.1 -526.34,733.66 v1(-445,815) -440,815 -400,855 -5,855 P7.1 ; P11.1@207.5,342.5 P11.1 150,400 P7.1 ; U0.8 694.8,-595 C15.1 754.8,-625.2 810,-570 820,-570 850,-540 850,-430 815,-395 U2.2 745,-395 715,-425 v2(615,-425) ; v1(640,-95) 588.46,-95 R6.2 583.46,-116.54 550,-150 550,-195 585,-230 625,-230 670,-185 725,-185 773.46,-136.54 R4.2 ; P10.1 635,900 600,865 600,855 ; R8.2 773.46,63.46 730,20 685,20 v1(640,-25) 575,-25 555,-5 555,8.94 554.5,9.44 554.5,30.56 583.46,59.53 R10.2 650,176.54 P12.1 600,750 600,855 ; P7.1 P7.2 295,745 295,810 335,850 595,850 600,855
  Bottom Layer w10: C7.1 245,22.56 v1(245,25)
  Bottom Layer w15: P6.1 -840.75,40.75 -785,-15 -785,-705 -810,-730 -810,-840 P0.2 -700,-850 -350,-850 -230,-730 100,-730 185,-815 365,-815 P5.1 450,-870 660,-660 v2(725,-660) ; v1(-200,-400) C2.2 ; v1(-200,-350) C6.1 ; C4.2@-187.44,-202.56 C4.2 ; C5.2 -170,-7.56 C1.2 -192.44,-47.44 -192.44,-57.44 -210.56,-75.56 -210.56,-317 C6.1 ; C7.1 237.44,2.56 260,-20 260,-250 ; C13.2 615,-475 v2(615,-425) 440,-250 260,-250 ; v1(640,-95) v1(640,-25) ; v1(800,-90) 835,-55 ; v1(800,105) 815,105 835,85 835,-55 ; v2(860,-410) 835,-385 835,-55 ; C2.2 C6.1 ; C2.2 -177.56,-417.44 -155,-440 187.56,-440 C3.2 260,-367.56 260,-250
pads on no net: U1.1@-483.58,907.11 U1.7@-907.84,482.84 U1.12@-554.29,129.29 U1.23 U1.25 U1.26 U1.35 U1.36 U1.38 U1.59 U1.60 U1.61 U1.62 U1.67 U1.70 U1.71 U1.73 U1.77 U1.80 U1.81 U1.82 U1.83 U1.84 U1.85 U1.88 U1.89 U1.90 U1.91 U1.95 U1.96 U1.97 U1.98 U2.4

## Polygon pours and split planes (outlines as drawn)
GND on Top Layer "Top Layer-No Net" (solid, remove dead copper, pour order 4): -985,985 -980,980 985,985 975,-980 985,-990 980,-985 -980,-985
GND on Bottom Layer "Top Layer-No Net" (solid, remove dead copper, pour order 6): -985,990 980,990 980,-985 -985,-985

## Silkscreen, mask and mechanical layers (free items; w line width, h text height)
Top Overlay:
  text "Central Control Unit V0.1" at -360,595 h100
  text "Board layout by AndyLithia" at 55,550 h60
  text "17.03.11 Lithcore.cn" at 180,510 h60
  text "LYY's Quadrocopter Project" at -765,405 h120
Bottom Overlay:
  region: 425,25 400,0 425,-25
  region: -25,425 0,400 25,425
  region: -425,-25 -400,0 -425,25
  region: 25,-425 0,-400 -25,-425
  region: -300,300 -125,300 -300,125
  lines w5: -859.25,-80 -705,-80 -705,90 -705.75,90.75 -859.25,90.75 ; -859,-500 -710,-500 -710,-325 -859,-325 ; -615,-690 -615,-685 -600,-670 ; -150,300 -150,145 25,145 25,300 ; -110,604.24 -110,720 85,720 ; -100.76,595 -90.76,585 85,585 85,720 ; 100,735 85,720 ; 400,-755 400,-850 435,-850 ; 535,435 535,185 365,185 365,435 530,435 555,460 555,560 565,570 575,570 ; 535,520 575,520 ; 575,620 535,620 ; 750,150 750,185 ; 850,85 850,70 ; -600,-670 -600,-350 -425,-350 -425,-670 -600,-670 ; 535,620 535,470 365,470 365,620 535,620 ; 850,70 960,70 960,-115 850,-115 850,70 ; -255,-475 300,-475 300,75 -255,75 -255,-475 ; 400,-785 400,-625 575,-625 575,-785 400,-785
  text "GND" at 75,680 h60
  text "B0" at -10,640 h60
  text "B1" at 75,640 h60
  text "GND" at 405,610 h60 r90
  text "RX" at 445,610 h60 r90
  text "TX" at 485,610 h60 r90
  text "3V3" at 525,610 h60 r90
  text "3V3" at 75,600 h60
  text "RPI" at 350,550 h60
  text "SWD" at 350,510 h60
  text "DBUG" at 350,470 h60
  text "NRST" at 405,425 h60 r90
  text "SWCLK" at 445,425 h60 r90
  text "SWDIO" at 485,425 h60 r90
  text "GND" at 525,425 h60 r90
  text "TX" at -105,285 h60 r90
  text "RX" at -65,285 h60 r90
  text "GND" at -25,285 h60 r90
  text "3V3" at 15,285 h60 r90
  text "BL" at 900,60 h60 r90
  text "FR" at 950,60 h60 r90
  text "3V3" at -720,50 h60
  text "GND" at -720,10 h60
  text "BR" at 900,-25 h60 r90
  text "FL" at 950,-25 h60 r90
  text "SCL" at -720,-30 h60
  text "SDA" at -720,-70 h60
  text "GND" at -555,-360 h60 r90
  text "CE" at -515,-360 h60 r90
  text "SCK" at -475,-360 h60 r90
  text "MISO" at -435,-360 h60 r90
  text "GND" at -720,-370 h60
  text "AD1" at -720,-410 h60
  text "AD2" at -720,-450 h60
  text "AD3" at -720,-490 h60
  text "3V3" at -555,-515 h60 r90
  text "CSN" at -515,-515 h60 r90
  text "MOSI" at -475,-515 h60 r90
  text "IRQ" at -435,-515 h60 r90
  text "3V3" at 445,-640 h60 r90
  text "GND" at 485,-640 h60 r90
  text "SCL" at 525,-640 h60 r90
  text "SDA" at 565,-640 h60 r90
Mechanical 1:
  lines w5: 984.25,-984.25 -984.25,984.25 ; -984.25,984.25 -984.25,984.25
  lines w10: -984.25,-984.25 -984.25,984.25 984.25,984.25 984.25,-984.25 -984.25,-984.25
Mechanical 13:
  lines w3.94: -1150,0 1400,0 ; 0,-1200 0,1425

## Dimensions
-984.25,984.25 to 984.25,984.25 on Mechanical 1
-984.25,984.25 to -984.25,-984.25 on Mechanical 1
905.51,905.51 to 1400,0 on Mechanical 1
905.51,905.51 to 0,1425 on Mechanical 1

## Text inside footprints (layer, text, board x,y; h text height)
P0: Bottom Overlay "2" at -850,-880 h50 r180; Bottom Overlay "1" at -830,-780 h50 r180; Bottom Overlay "7" at -390,-780 h50 r180; Bottom Overlay "8" at -390,-880 h50 r180
P7: Bottom Overlay "6" at 230,960 h50 r270; Bottom Overlay "5" at 130,960 h50 r270; Bottom Overlay "2" at 230,600 h50 r270; Bottom Overlay "1" at 130,620 h50 r270
U1: Bottom Overlay "VCC" at -441.86,780.53 h35 r45; Bottom Overlay "VCC" at -717.63,504.76 h35 r45; Bottom Overlay "GND" at -229.73,568.4 h35 r45; Bottom Overlay "GND" at -505.5,292.63 h35 r45; Bottom Overlay "RX" at -378.22,702.75 h35 r45; Bottom Overlay "TX" at -307.51,632.04 h35 r45; Bottom Overlay "SDA" at -576.21,363.34 h35 r45; Bottom Overlay "SCL" at -646.92,434.05 h35 r45; Bottom Overlay "D0" at -512.57,851.25 h35 r45; Bottom Overlay "D1" at -166.09,490.62 h35 r45; Bottom Overlay "D2" at -788.34,575.47 h35 r45; Bottom Overlay "D3" at -441.86,214.85 h35 r45